# Altium PCB RS422 Breakout.PcbDoc
Units mil, origin at the board's own origin, x right, y up, seen from the top; angles counter-clockwise.
Board outline 1250 x 880 mil, 2 copper layers (Top Layer, Bottom Layer), stack 30.315 mil thick; 22 components, 22 nets, 75 pads, 38 vias.
Unrouted connection lines stored in the file: 8.
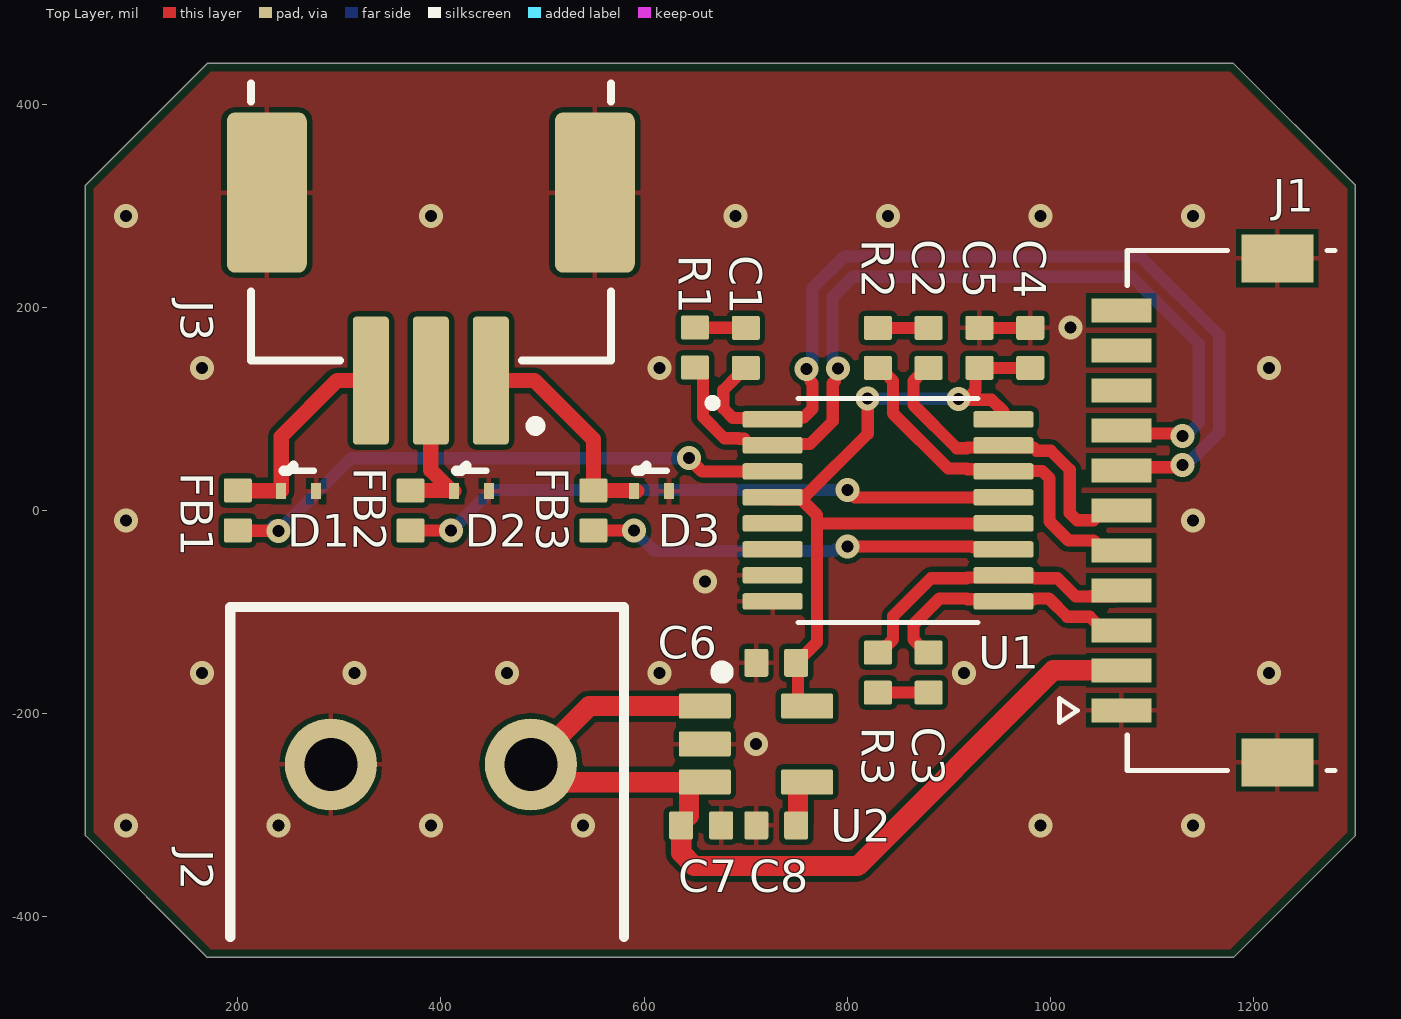
[diagram p0: Top Layer view]
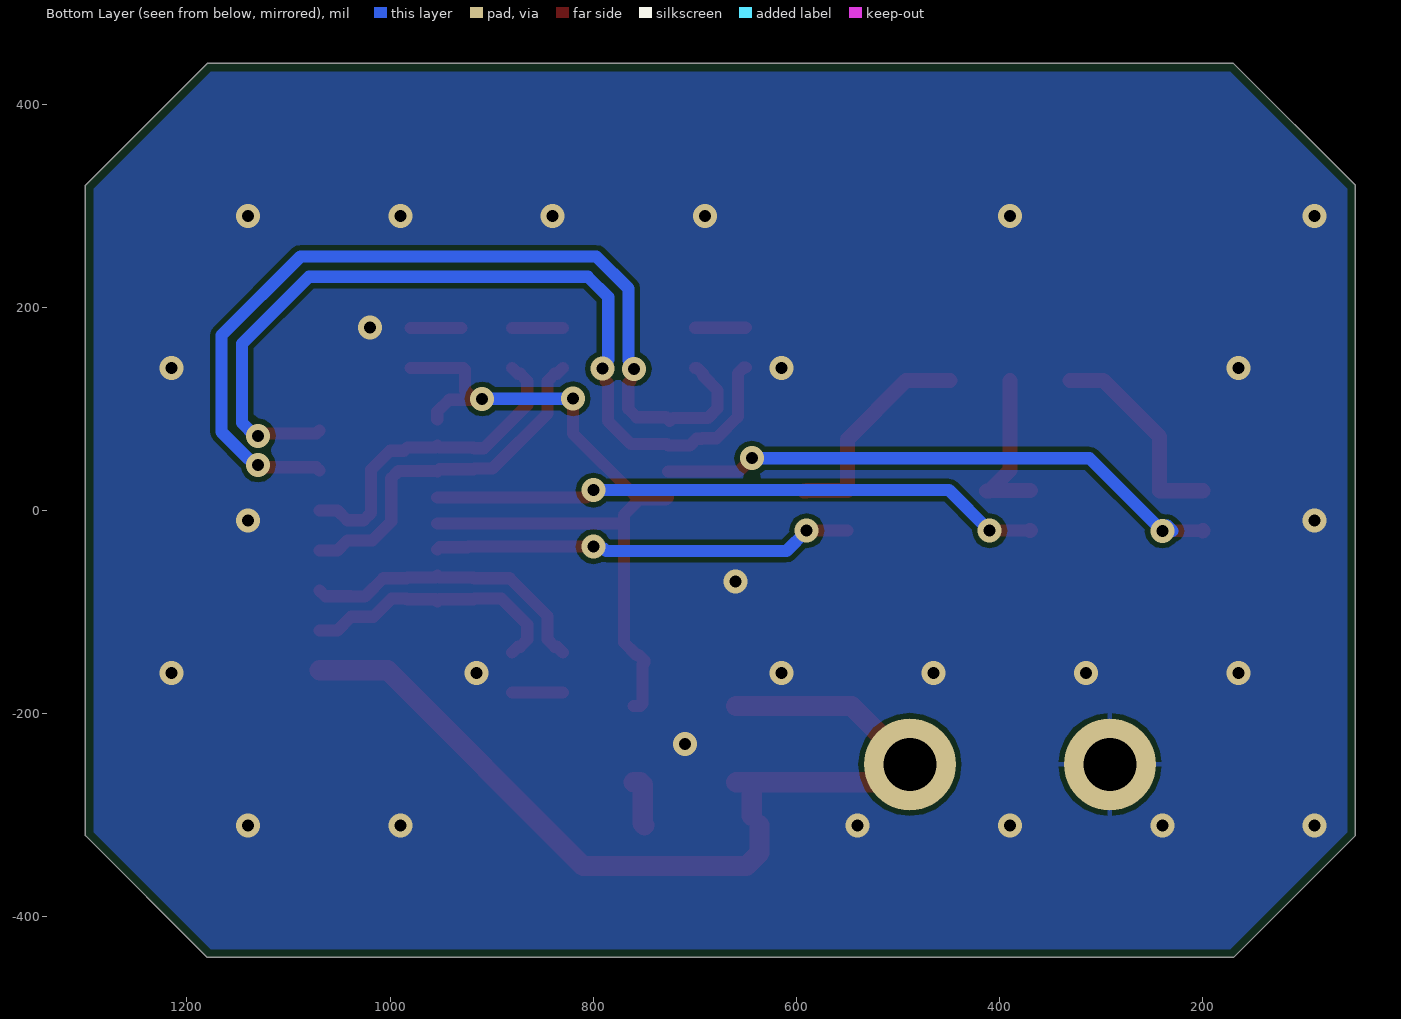
[diagram p1: Bottom Layer view, seen from below]
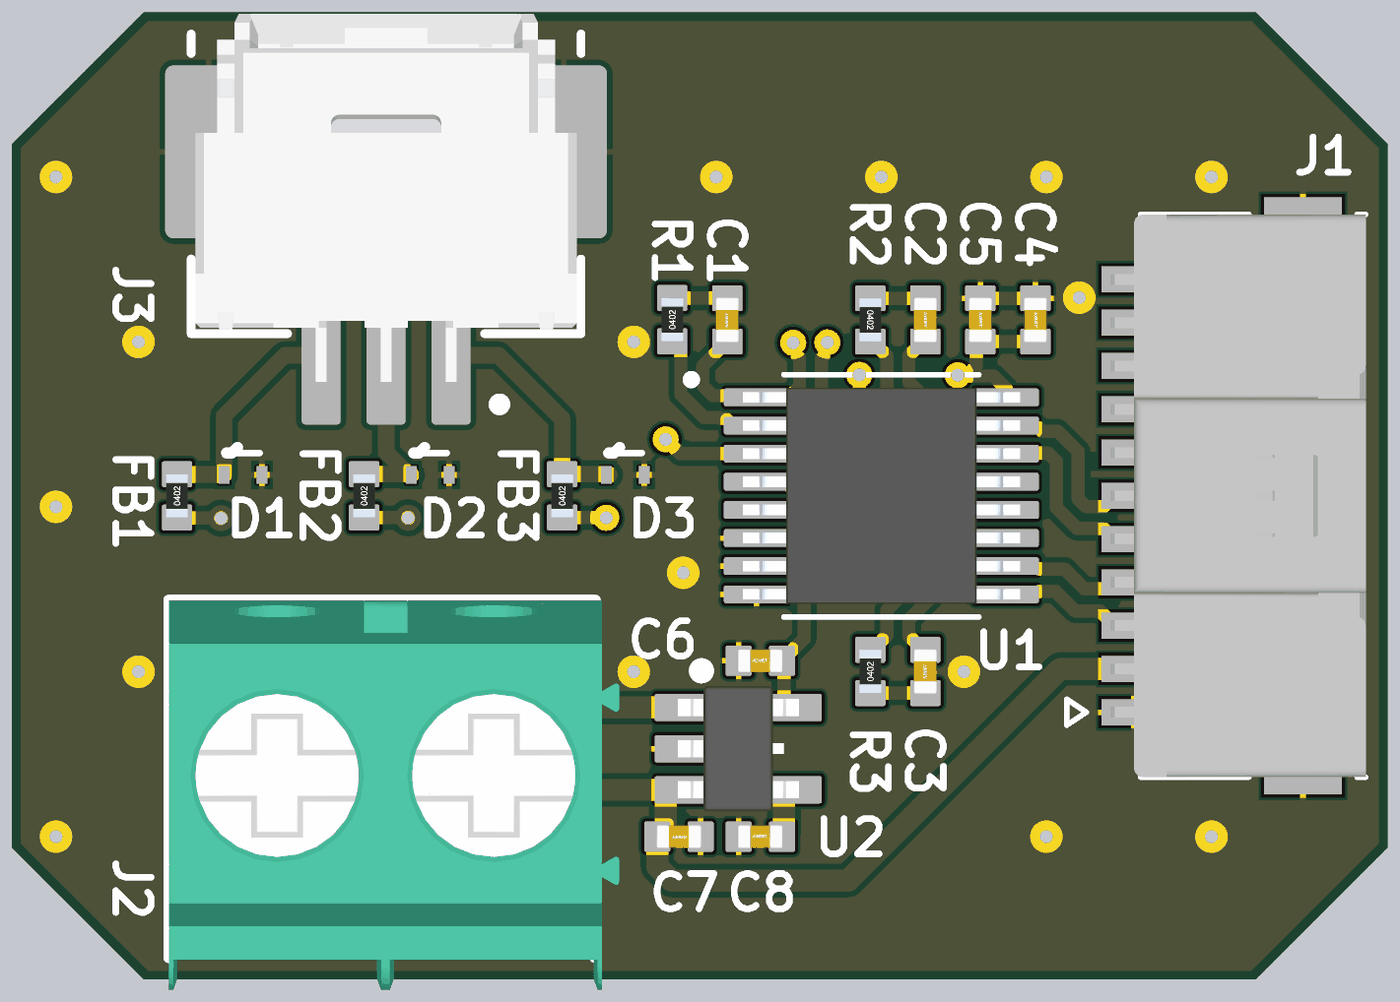
[diagram p2: 3D render of the assembled board from above, using the file's embedded part models]

## Layer stack, top to bottom
Top Solder: solder mask 0.5, Solder Resist, Dk 3.8
Top Layer: signal copper 1.378
Dielectric: core 27.5591, FR-4, Dk 4.5
Bottom Layer: signal copper 1.378
Bottom Solder: solder mask 0.5, Solder Resist, Dk 3.8

## Board outline
50,-320 170,-440 1180,-440 1300,-320 1300,320 1180,440 170,440 50,320

## Design rules (kind name [scope] priority, off if disabled: settings)
BoardOutlineClearance [All] p1: gap=7.87 ignorepadtopadclearanceinfootprint=FALSE
Clearance [All] p1: gap=5 ignorepadtopadclearanceinfootprint=FALSE except(9.84: Arc-Hole Track-Hole SMDPad-Hole THPad-Hole Via-Hole Fill-Hole Poly-Hole Region-Hole Text-Hole)
ComponentClearance [All] p1: gap=5 collisioncheckmode=3 verticalgap=5 showdistances=TRUE
DiffPairsRouting [All] p1: maxlimit=8 minlimit=8 mostfreqgap=8 toplayer_minwidth=5 toplayer_maxwidth=1000 toplayer_prefwidth=12 bottomlayer_minwidth=5 bottomlayer_maxwidth=1000 bottomlayer_prefwidth=12 maxuncoupledlength=500
Height [All] p1: minheight=0 maxheight=71497.94 prefheight=500
HoleSize [All] p1: absolutevalues=TRUE maxlimit=248.03 minlimit=11.81 maxpercent=80.000 minpercent=20.000
HoleToHoleClearance [All] p1: gap=9.84 allowstackedmicrovias=FALSE
MinimumAnnularRing [All] p1: minimumring=3
MinimumSolderMaskSliver [All] p1: minsoldermaskwidth=0
PlaneClearance [All] p1: clearance=5
PlaneConnect PlaneConnectPowerPads [InPadClass('PowerPads')] p1: planeconnectstyle=Direct reliefexpansion=20 reliefentries=4 reliefconductorwidth=10 reliefairgap=10
PlaneConnect [All] p2: pad.planeconnectstyle=Relief pad.reliefexpansion=11.81 pad.reliefentries=4 pad.reliefconductorwidth=5 pad.reliefairgap=5 via.planeconnectstyle=Direct via.reliefexpansion=11.81 via.reliefentries=4 via.reliefconductorwidth=5 via.reliefairgap=5
PolygonConnect PolygonConnectPowerPads [All vs (InPadClass('PowerPads'))] p1: connectstyle=Direct reliefconductorwidth=10 reliefentries=4 polygonreliefangle="90 Angle" airgapwidth=10
PolygonConnect [All] p2: thpad.connectstyle=Relief thpad.reliefconductorwidth=5 thpad.reliefentries=4 thpad.polygonreliefangle="90 Angle" thpad.airgapwidth=5 smdpad.connectstyle=Relief smdpad.reliefconductorwidth=5 smdpad.reliefentries=4 smdpad.polygonreliefangle="90 Angle" smdpad.airgapwidth=5 via.connectstyle=Direct via.reliefconductorwidth=5 via.reliefentries=4 via.polygonreliefangle="90 Angle" via.airgapwidth=5
RoutingVias [All] p1: holewidth=11.81 width=23.62 viastyle="Through Hole" minholewidth=11.81 minwidth=23.62 maxholewidth=23.62 maxwidth=259.84
SilkToSilkClearance [All] p1: silktosilkclearance=0
SilkToSolderMaskClearance [IsPad] p1: minsilkscreentomaskgap=5 clearancetoexposedcopper=TRUE
SolderMaskExpansion [All] p1: expansion=2.95 istentingtop=FALSE
Width [All] p1: maxlimit=1000 minlimit=5 preferedwidth=5 minimp=50.000000 maximp=50.000000 favimp=50.000000
20 further rules are at their usual default settings.

## Classes and differential pairs
differential pair Z: +Z_P -Z_N
differential pair B: +B_P -B_N
differential pair A: +A_P -A_N

## Components (designator, comment, footprint, x,y, rotation, side; value= is the part's Value field where it differs from the comment)
C1 "CAP_0.01uF_16V_X7R_0402" CAP0402 700,160 r90 top
C2 "CAP_0.01uF_16V_X7R_0402" CAP0402 880,160 r270 top
C3 "CAP_0.01uF_16V_X7R_0402" CAP0402 880,-159.68 r90 top
C4 "CAP_1UF_10V_0402_X5R" CAP0402 980,160 r270 top
C5 "CAP_0.1uF_10V_0402" CAP0402 930,160 r270 top value=0.1µF
C6 "CAP_1UF_10V_0402_X5R" CAP0402 730,-150 r0 top
C7 "CAP_1UF_10V_0402_X5R" CAP0402 656.09,-310 r180 top
C8 "CAP_1UF_10V_0402_X5R" CAP0402 730,-310 r0 top
D1 "TVS_DIODE_UNIDIR_3.3V_7A" SOD-923 260,18.99 r0 top
D2 "TVS_DIODE_UNIDIR_3.3V_7A" SOD-923 430,18.99 r0 top
D3 "TVS_DIODE_UNIDIR_3.3V_7A" SOD-923 607.22,18.99 r0 top
FB1 "FERRITE_BEAD_600OHM_0402" RES0402 200,0 r90 top
FB2 "FERRITE_BEAD_600OHM_0402" RES0402 370,0 r90 top
FB3 "FERRITE_BEAD_600OHM_0402" RES0402 550,0 r90 top
J1 "CON_12M_SM_RA" MOLEX-5015681107 1170,0 r90 top
J2 "CON_2POS_SCREW_TERM" 1935161 390,-250 r0 top
J3 "CON_3M_SM_RA" MOLEX-5025850370 390,294.16 r180 top
R1 "RES_120Ω_0402_5%" RES0402 650,160.32 r90 top value=120Ω
R2 "RES_120Ω_0402_5%" RES0402 830,160 r270 top value=120Ω
R3 "RES_120Ω_0402_5%" RES0402 830,-159.68 r90 top value=120Ω
U1 "MAX3094ECUE+T" SOP65P640X110-16N 840,0 r0 top
U2 "LDO_3.3V_200mA" SOT23-5 710,-230 r0 top

## Footprints (in the part's own frame and the unit in brackets; to place one, negate y for a bottom-side part, rotate by r counter-clockwise, add the part's x,y. Pads: shape width x height; smd on the part's side, far side on the other; paste and mask are expansions set on the pad)
1935161 [mm] "TERM BLK 2POS SIDE ENTRY 5MM PCB"
  round 2.3 hole 1.325: 1(-2.5,0) 2(2.5,0)
  silkscreen extent -5.01,-4.32 4.83,3.94, body extent -5.01,-5.06 5.39,3.94, height 11.41
CAP0402 [mm] "Chip Capacitor, Body 1x0.5mm, Height 0.35mm, IPC Medium Density"
  rrect15% 0.6x0.7 smd: 1(-0.5,0) 2(0.5,0)
  body extent -0.52,-0.28 0.52,0.28, height 0.54
MOLEX-5015681107 [mm] "Connector Header Surface Mount, Right Angle 11 position 0.039\" (1.00mm)"
  rect 0.6x1.5 smd mask+0: 1(-5,2.55) 2(-4,2.55) 3(-3,2.55) 4(-2,2.55) 5(-1,2.55) 6(0,2.55) 7(1,2.55) 8(2,2.55) 9(3,2.55) 10(4,2.55) 11(5,2.55)
  rect 1.2x1.8 smd mask+0: S1(6.3,-1.35) S2(-6.3,-1.35)
  silkscreen extent -6.5,-2.79 6.5,4.1, body extent -6.5,-2.8 6.5,3.1, height 4.71
MOLEX-5025850370 [mm]
  rrect20% 2x4 smd paste+0 mask+0: 0(-4.1,-0.475) 0(4.1,-0.475)
  rrect20% 0.9x3.2 smd paste+0 mask+0: 1(-1.5,4.225) 2(0,4.225) 3(1.5,4.225)
  silkscreen extent -4.5,-3.2 4.5,5.48, body extent -4.4,-3.67 4.4,4.83, height 6.4
RES0402 [mm] "Chip Resistor, Body 1x0.5mm, IPC Medium Density"
  rrect15% 0.6x0.7 smd: 1(-0.5,0) 2(0.5,0)
  body extent -0.5,-0.25 0.5,0.25, height 0.27
SOD-923 [mm]
  rect 0.25x0.4 smd mask+0.05: 1(-0.437,0) 2(0.437,0)
  silkscreen extent -0.38,0.51 0.38,0.64
SOP65P640X110-16N [mm]
  rrect25% 1.5x0.41 smd: 1(-2.885,2.275) 2(-2.885,1.625) 3(-2.885,0.975) 4(-2.885,0.325) 5(-2.885,-0.325) 6(-2.885,-0.975) 7(-2.885,-1.625) 8(-2.885,-2.275) 9(2.885,-2.275) 10(2.885,-1.625) 11(2.885,-0.975) 12(2.885,-0.325) 13(2.885,0.325) 14(2.885,0.975) 15(2.885,1.625) 16(2.885,2.275)
  silkscreen extent -4.48,-2.8 2.25,2.8, body extent -3.2,-2.5 3.2,2.5, height 1.1
SOT23-5 [mm]
  rrect15% 1.3x0.63 smd: 1(-1.279,0.95) 2(-1.279,0) 3(-1.279,-0.95) 4(1.279,-0.95) 5(1.279,0.95)
  silkscreen extent -0.99,1.66 -0.71,1.94, body extent -1.4,-1.45 1.4,1.45, height 1.2

## Part data
C1 C2 C3: "CAP CER 0.01uF 16V X7R 0402", Capacitance=0.01μF, Manufacturer=KEMET, Manufacturer Part Number=C0402C103J4RACTU, Supplier Part Number 1=399-1039-1-ND, Voltage Rating=16V, Mounting Type="Surface Mount", Supplier 1=Digi-Key
C4 C6 C7 C8: "CAP CER 1UF 10V X5R 0402", Capacitance=1μF, Manufacturer="Kyocera AVX", Manufacturer Part Number=0402ZD105MAT2A, Package=0402, Rated DC Voltage (URdc)=10V, Supplier Part Number 1=478-5768-1-ND, Temperature Characteristics Code=X5R, ComponentLink7Description=https://datasheet.ciiva.com/11531/cx5r-11531784.pdf?src-supplier=Avnet, ComponentLink7URL=https://datasheet.ciiva.com/11531/cx5r-11531784.pdf?src-supplier=Avnet, Mounting Type="Surface Mount", Supplier 1=Digi-Key
C5: "CAP CER 0.1UF 10V X7R 0402", Manufacturer 1="Murata Electronics", Manufacturer Part Number 1=GRM155R71A104KA01D, Package/Footprint=0402, Supplier Part Number 1=490-6321-1-ND, Voltage Rating=10V, Supplier 1=Digi-Key
D1 D2 D3: "TVS DIODE 3.3VWM 11VC SOD923", Manufacturer 1="Central Semiconductor Corp", Manufacturer Part Number 1="CMATVS3V3 TR PBFREE", Package/Footprint=SOD-923, Supplier Part Number 1=1514-CMATVS3V3TRPBFREECT-ND, Voltage - Breakdown (Min)=5V, Voltage - Clamping (Max) @ Ipp=11V, Voltage - Reverse Standoff (Typ)=3.3V, Mounting Type=SMD, Supplier 1=Digi-Key
FB1 FB2 FB3: "FIXED IND 1UH 3.8A 33 MOHM SMD", Current Rating (Max)=300mA, DC Resistance (DCR) (Max)=520mΩ, Impedance @ Frequency="600Ω @ 100 MHz", Manufacturer 1="TDK Corporation", Manufacturer Part Number 1=MMZ1005S601CT000, Package=0402, Package/Footprint=SMD, Supplier Part Number 1=445-2162-1-ND, Impedance=600Ω, Mounting Type=SMD, Supplier 1=Digi-Key
J1: library part CON_11M_SM_RA, "CONN HEADER SMD RIGHT ANGLE 1MM PITCH", Package=None, Availability=Unavailable, MP="Molex, 5015681107", Price=None
J2: "TERM BLK 2POS SIDE ENTRY 5MM", Manufacturer 1="Phoenix Contact", Manufacturer Part Number 1=1935161, Package/Footprint=SMD, Supplier Part Number 1=277-1667-ND, Mounting Type=TH, Supplier 1=Digi-Key
J3: "CONN RCPT 3POS 0.059 TIN SMD R/A", Current Rating=2A, Manufacturer 1=Molex, Manufacturer Part Number 1=5025850370, Package/Footprint=SMD, Supplier Part Number 1=WM12831CT-ND, Voltage Rating=100V, Family=CLIK-Mate, Mounting Type=SMD, Orientation="Right Angle", Pitch=1.5mm, Supplier 1=Digi-Key
R1 R2 R3: "RES 120 OHM 5% 1/16W 0402", Manufacturer 1=Yageo, Manufacturer Part Number 1=RC0402JR-07120RL, Package/Footprint=0402, Power=1/16W, Supplier Part Number 1=311-120JRCT-ND, Tolerance=5%, Mounting Type=SMD, Supplier 1=Digi-Key
U1: "IC RECEIVER 0/4 16TSSOP", Rating="3 - 3.6Vin", Manufacturer Part Number=MAX3094ECUE+T
U2: "IC REG LINEAR 3.3V 200MA SOT23-5", Manufacturer Part Number=LDK120M33R, Rating="3V3 Vout"

## Via types
v1: diameter 23.62, hole 11.81, Top Layer to Bottom Layer, 38 vias

## Nets (pads, with @x,y where several pads share a name; then routed paths per layer and width w, separated by ;. In a path a pad name is that pad's centre, name@x,y a point inside that pad or via, vN(x,y) a via of type N, cw(c..) or ccw(c..) an arc to the next point about the centre after c; other vN are vias at no path point)
+3V3: C4.2 C5.2 C6.2 U1.4 U1.12 U1.16 U2.5 | length 836.2
  Top Layer w12: U2.5 753.9,-192.6 751.5,-190.2 751.5,-151.81 C6.2 749.68,-148.03 755.5,-142.22 757.46,-142.22 770,-129.68 770,-12.8 ; v1(820,110) 820,75.49 759.37,14.87 728.49,14.87 U1.4 728.49,10.72 754.87,10.72 770,-4.41 770,-12.8 ; U1.12 854.22,-12.8 770,-12.8 ; U1.16 953.58,97.27 941.87,108.99 910.08,108.99 v1(909.39,109.68) 909.7,110 918.28,110 926.22,117.94 926.22,138.5 928.03,140.32 C5.2 C4.2
  Bottom Layer w12: v1(820,110) 820.16,109.84 909.23,109.84 v1(909.39,109.68)
+5V: C7.2 J1.2 J2.2 U2.1 U2.3 | length 952.8
  Top Layer w20: C7.2 636.41,-337.09 649.32,-350 810,-350 1002.52,-157.48 J1.2 ; C7.2@644.06,-300.38 644.06,-269.8 U2.3@646.46,-267.4 ; U2.3 U2.3@646.46,-267.4 ; U2.1 545.83,-192.6 J2.2 507.52,-250 524.92,-267.4 U2.3@646.46,-267.4
A: FB1.1 U1.3 | length 568.8
  Top Layer w12: FB1.1@200.32,-20 v1@239.68,-20 ; v1(644.01,51.37) 656.99,38.39 U1.3
  Top Layer w15: FB1.1 FB1.1@200.32,-20 ; v1@239.68,-20 v1(240,-20.32)
  Bottom Layer w12: v1@229.84,-20.16 v1@234.84,-15.16 ; v1(240,-20.32) 311.68,51.37 v1(644.01,51.37)
A_N: C1.1 J1.7 U1.1 | length 910.9
  Top Layer w12: C1.1 698.03,140.32 692.22,134.5 692.22,132.72 677.78,118.28 677.78,100.5 687.22,91.07 721.56,91.07 724.74,87.89 728.49,91.64 757.33,91.64 765.69,100 765.69,125.2 763.6,127.29 ; J1.7 1072.76,42.52 1127.78,42.52 v1(1130,44.74)
  Bottom Layer w12: v1(759.9,139.21) 759.9,142.35 765.43,147.88 765.43,218.28 797.15,250 1088.28,250 1165.94,172.35 1165.94,77.04 1139.45,50.56 1138.96,50.56 1133.14,44.74 v1(1130,44.74)
A_P: J1.8 R1.1 U1.2 | length 873.2
  Top Layer w12: R1.1 651.97,140.63 657.78,134.82 657.78,92.22 678.93,71.07 692.94,71.07 693.52,70.5 698.44,70.5 704.96,63.98 U1.2 727.66,65.22 763.04,65.22 785.69,87.87 785.69,125.2 787.78,127.29 ; J1.8 1072.76,75.59 1127.78,75.59 v1(1130,73.37)
  Bottom Layer w12: v1(790.96,139.54) 790.96,142.68 785.43,148.21 785.43,210 805.43,230 1080,230 1145.94,164.06 1145.94,86.21 1133.1,73.37 v1(1130,73.37)
A_PROT: D1.1 FB1.2 J3.3 | length 204.9
  Top Layer w15: FB1.2 200.32,19.36 D1.1@240,19.36 ; D1.1 242.78,72.78 297.82,127.82 J3.3
B: FB2.1 U1.13 | length 603.3
  Top Layer w12: FB2.1@370.16,-19.84 v1@409.84,-19.84 ; v1(800,20) 807.2,12.8 U1.13
  Top Layer w15: FB2.1 FB2.1@370.16,-19.84 ; v1@409.84,-19.84 v1(410,-20)
  Bottom Layer w12: v1(410,-20) 450,20 v1(800,20)
B_N: C2.2 J1.6 U1.15 | length 326.9
  Top Layer w12: C2.2 874.19,134.5 872.03,134.5 865,127.47 865,103.8 907.62,61.18 917.56,61.18 918.28,61.91 951.51,61.91 U1.15 955.65,61.91 983.19,61.91 986.29,58.8 1000.15,58.8 1018.95,40 1018.95,11.19 1018.95,-2.66 1025.98,-9.68 1042.2,-9.68 1051.89,0 J1.6
B_P: J1.5 R2.2 U1.14 | length 358.1
  Top Layer w12: R2.2 835.81,134.5 837.97,134.5 845,127.47 845,95.51 899.33,41.18 917.56,41.18 918.28,40.46 951.51,40.46 U1.14 954,38.8 991.87,38.8 998.95,31.72 998.95,19.47 998.95,-10.94 1017.7,-29.68 1042.2,-29.68 1051.89,-39.37 J1.5
B_PROT: D2.1 FB2.2 J3.2 | length 159.4
  Top Layer w15: FB2.2 D2.1@409.88,19.68 ; J3.2 390,39.56 D2.1@409.88,19.68 ; D2.1 410.57,18.99 D2.1@409.88,19.68
C_PROT: D3.1 FB3.2 J3.1 | length 218.3
  Top Layer w15: J3.1 492.18,127.82 550,70 FB3.2 589.88,19.68 590.57,18.99 D3.1@592.78,18.99
GND: C4.1 C5.1 C6.1 C7.1 C8.1 D1.2 D2.2 D3.2 J1.1 J1.S1 J1.S2 J2.1 J3.0 U1.6 U1.7 U1.8 U2.2 | length 50
  Top Layer w12: C5.1 C4.1
  other v1: 90,-310 240,-310 390,-310 540,-310 990,-310 1140,-310 709.83,-229.77 165,-160 315,-160 465,-160 615,-160 915,-160 1215,-160 660,-70 90,-10 1140,-10 165,140 615,140 1215,140 1019.83,180.23 90,290 390,290 690,290 840,290 990,290 1140,290
NetC1_2: C1.2 R1.2 | length 50.1
  Top Layer w12: R1.2 650.16,179.84 699.84,179.84 C1.2
NetC2_1: C2.1 R2.1 | length 50
  Top Layer w12: R2.1 C2.1
NetC3_1: C3.1 R3.1 | length 50
  Top Layer w12: R3.1 C3.1
NetC8_2: C8.2 U2.4 | length 50.8
  Top Layer w20: C8.2 751.5,-308.19 751.5,-269.8 753.9,-267.4 U2.4
U: J1.9
V: J1.10
W: J1.11
Z: FB3.1 U1.11 | length 415
  Top Layer w12: FB3.1 550.16,-19.84 589.84,-19.84 v1(590,-20) ; v1(800,-35.61) 923.03,-35.61 923.73,-36.31 951.51,-36.31 U1.11
  Bottom Layer w12: v1(590,-20) 610,-40 787.39,-40 789.56,-37.83 797.78,-37.83 v1(800,-35.61)
Z_N: C3.2 J1.3 U1.9 | length 265.6
  Top Layer w12: C3.2 874.19,-134.19 872.03,-134.19 865,-127.16 865,-112.35 890.57,-86.77 917.56,-86.77 918.28,-87.5 951.51,-87.5 U1.9 955.65,-87.5 983.42,-87.5 984.14,-86.77 998.49,-86.77 1016.41,-104.69 1038.47,-104.69 1051.89,-118.11 J1.3
Z_P: J1.4 R3.2 U1.10 | length 295.7
  Top Layer w12: R3.2 835.81,-134.19 837.97,-134.19 845,-127.16 845,-104.06 882.29,-66.77 917.56,-66.77 918.28,-66.05 951.51,-66.05 U1.10 955.65,-66.05 983.42,-66.05 984.14,-66.77 1006.77,-66.77 1024.69,-84.69 1039.05,-84.69 1039.19,-84.55 1063.8,-84.55 J1.4
pads on no net: U1.5

## Polygon pours and split planes (outlines as drawn)
GND on Top Layer "GND_L01_P002" (solid, remove dead copper, pour order 2): 50,-320 170,-440 1180,-440 1300,-320 1300,320 1180,440 170,440 50,320
GND on Bottom Layer "GND_L02_P003" (solid, remove dead copper, pour order 3): 50,-320 170,-440 1180,-440 1300,-320 1300,320 1180,440 170,440 50,320

## Silkscreen, mask and mechanical layers (free items; w line width, h text height)
Mechanical 1:
  lines w10: 170,-440 1180,-440 1300,-320 1300,320 1180,440 170,440 50,320 50,-320 170,-440 ; 170,-440 170,-440